# Altium PCB QuadCurrentLoopCape.PcbDoc
Units mil, origin at the board's own origin, x right, y up, seen from the top; angles counter-clockwise.
Board outline 3400 x 2150 mil, 4 copper layers (Component Side, Ground Plane, +3V3, Solder Side), stack 32.517 mil thick; 75 components, 68 nets, 363 pads, 39 vias.
Unrouted connection lines stored in the file: 1.
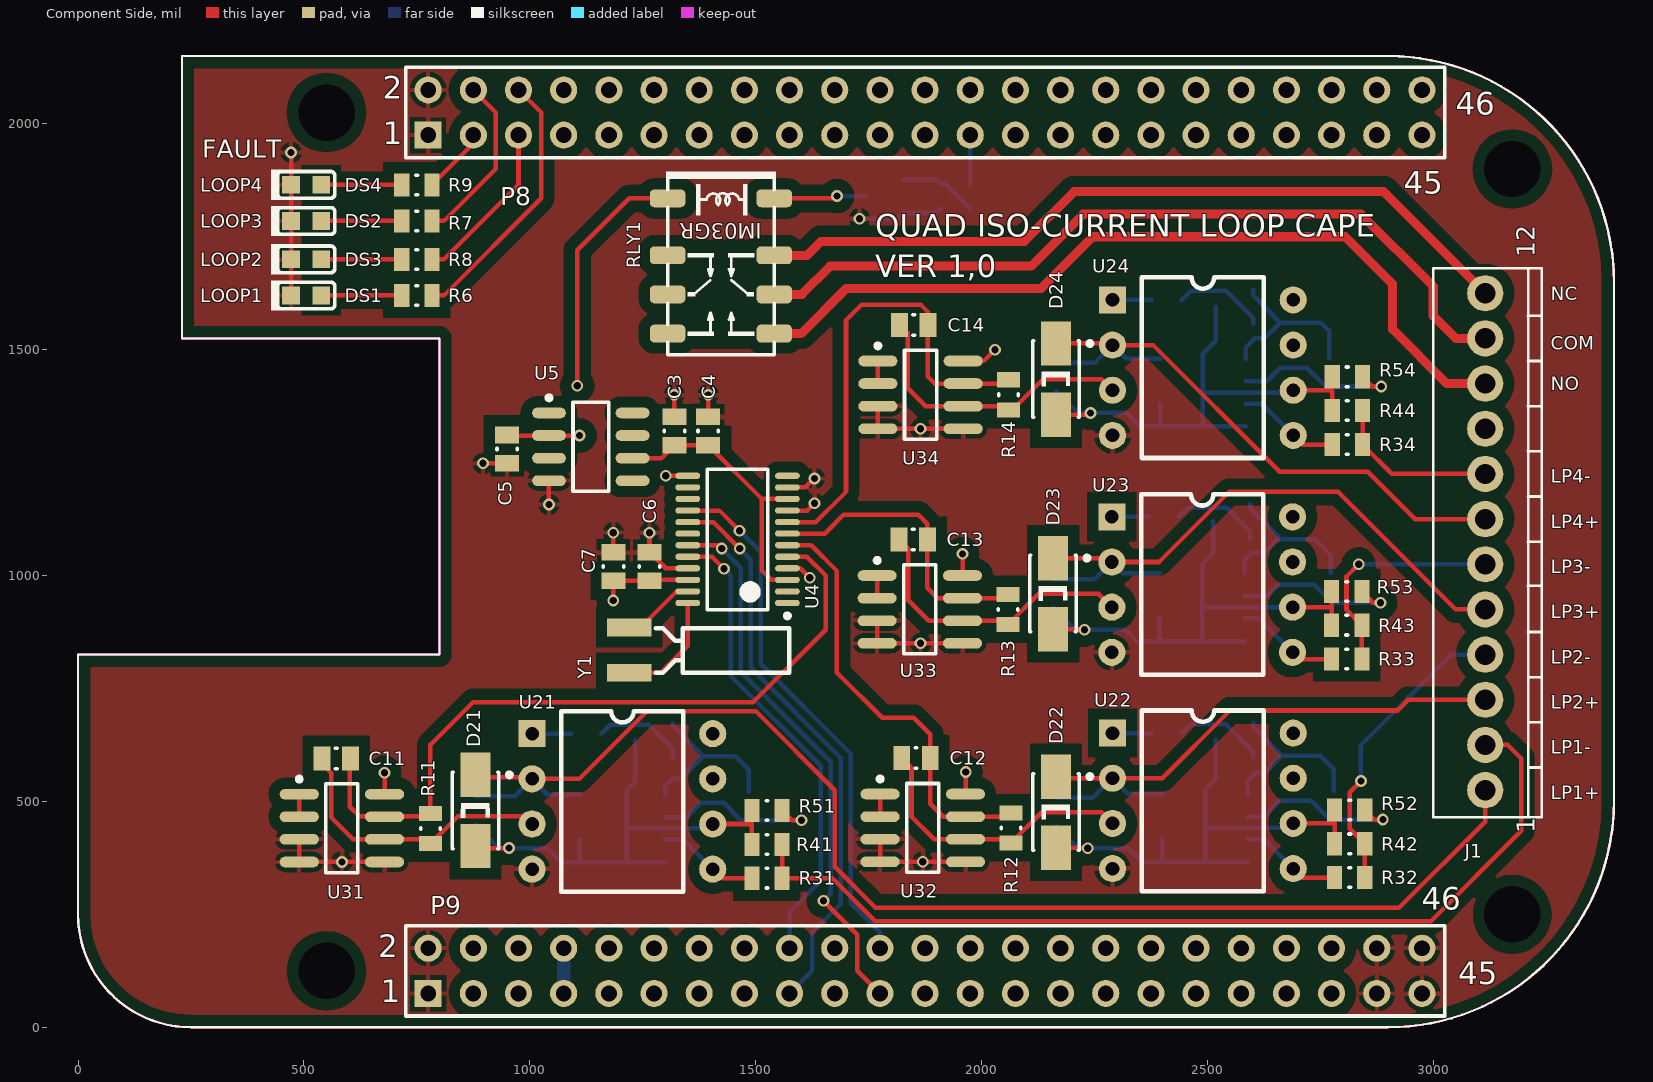
[diagram p0: Component Side view]
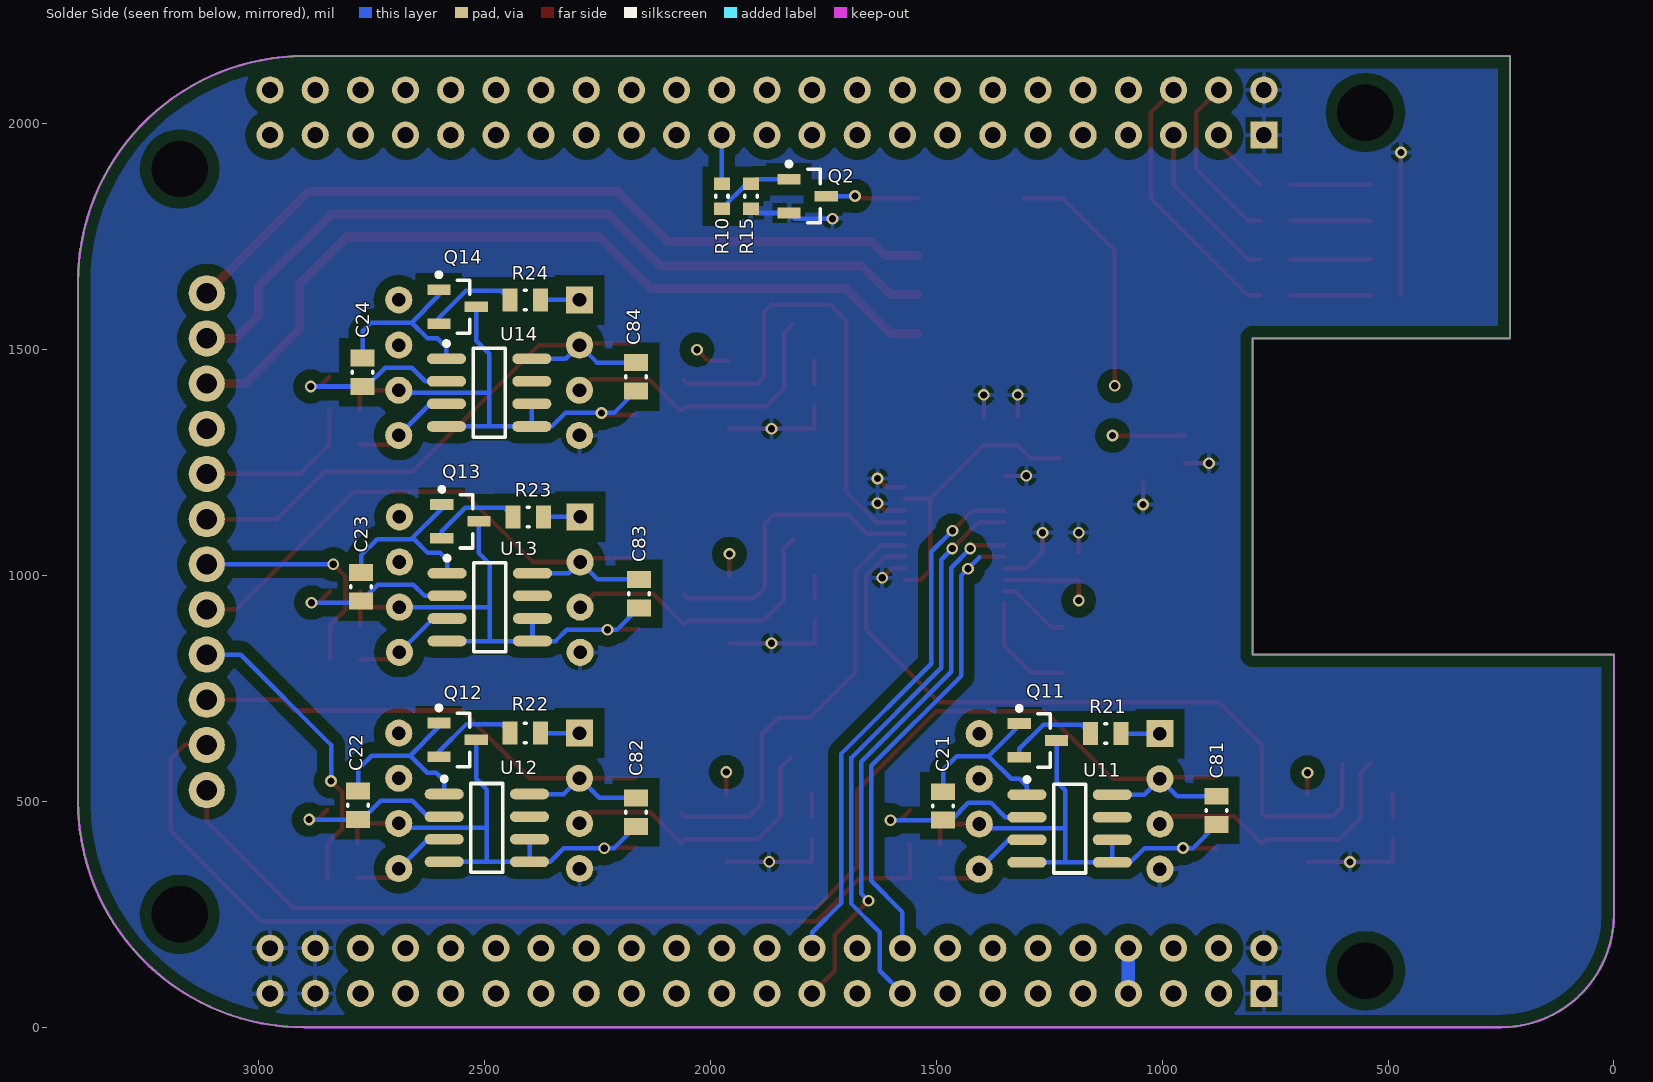
[diagram p1: Solder Side view, seen from below]
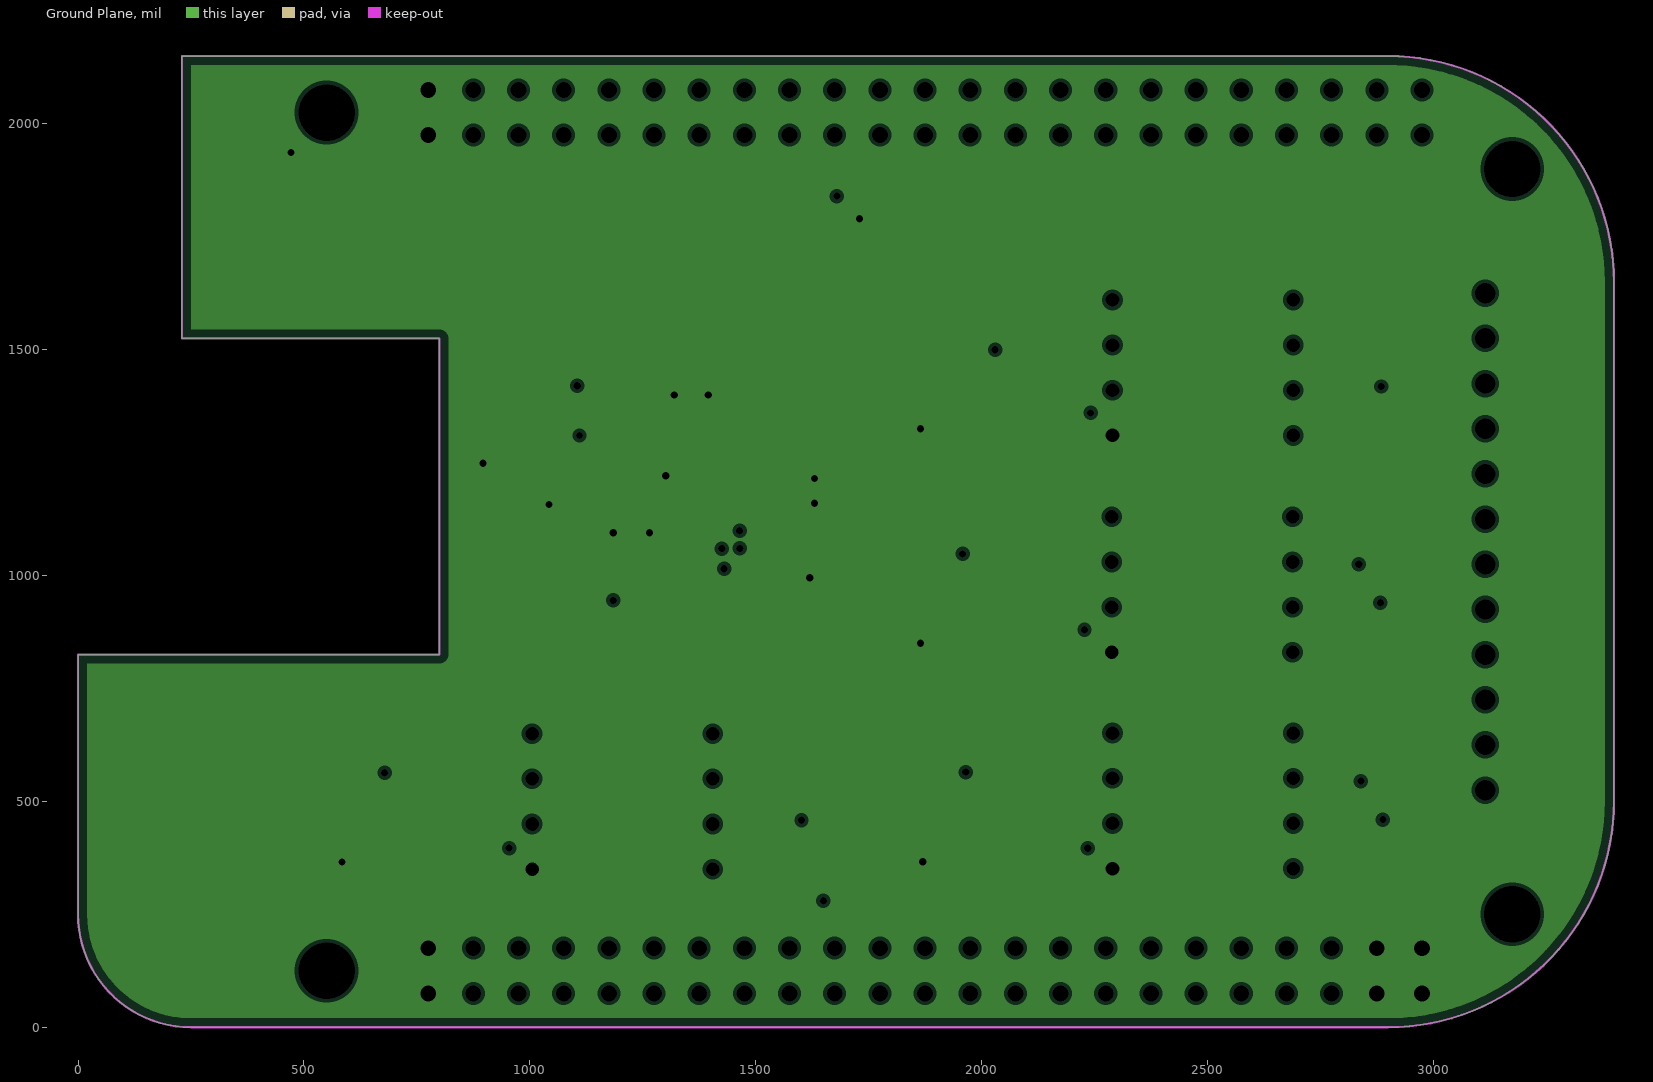
[diagram p2: Ground Plane, clearances drawn from the general rule]
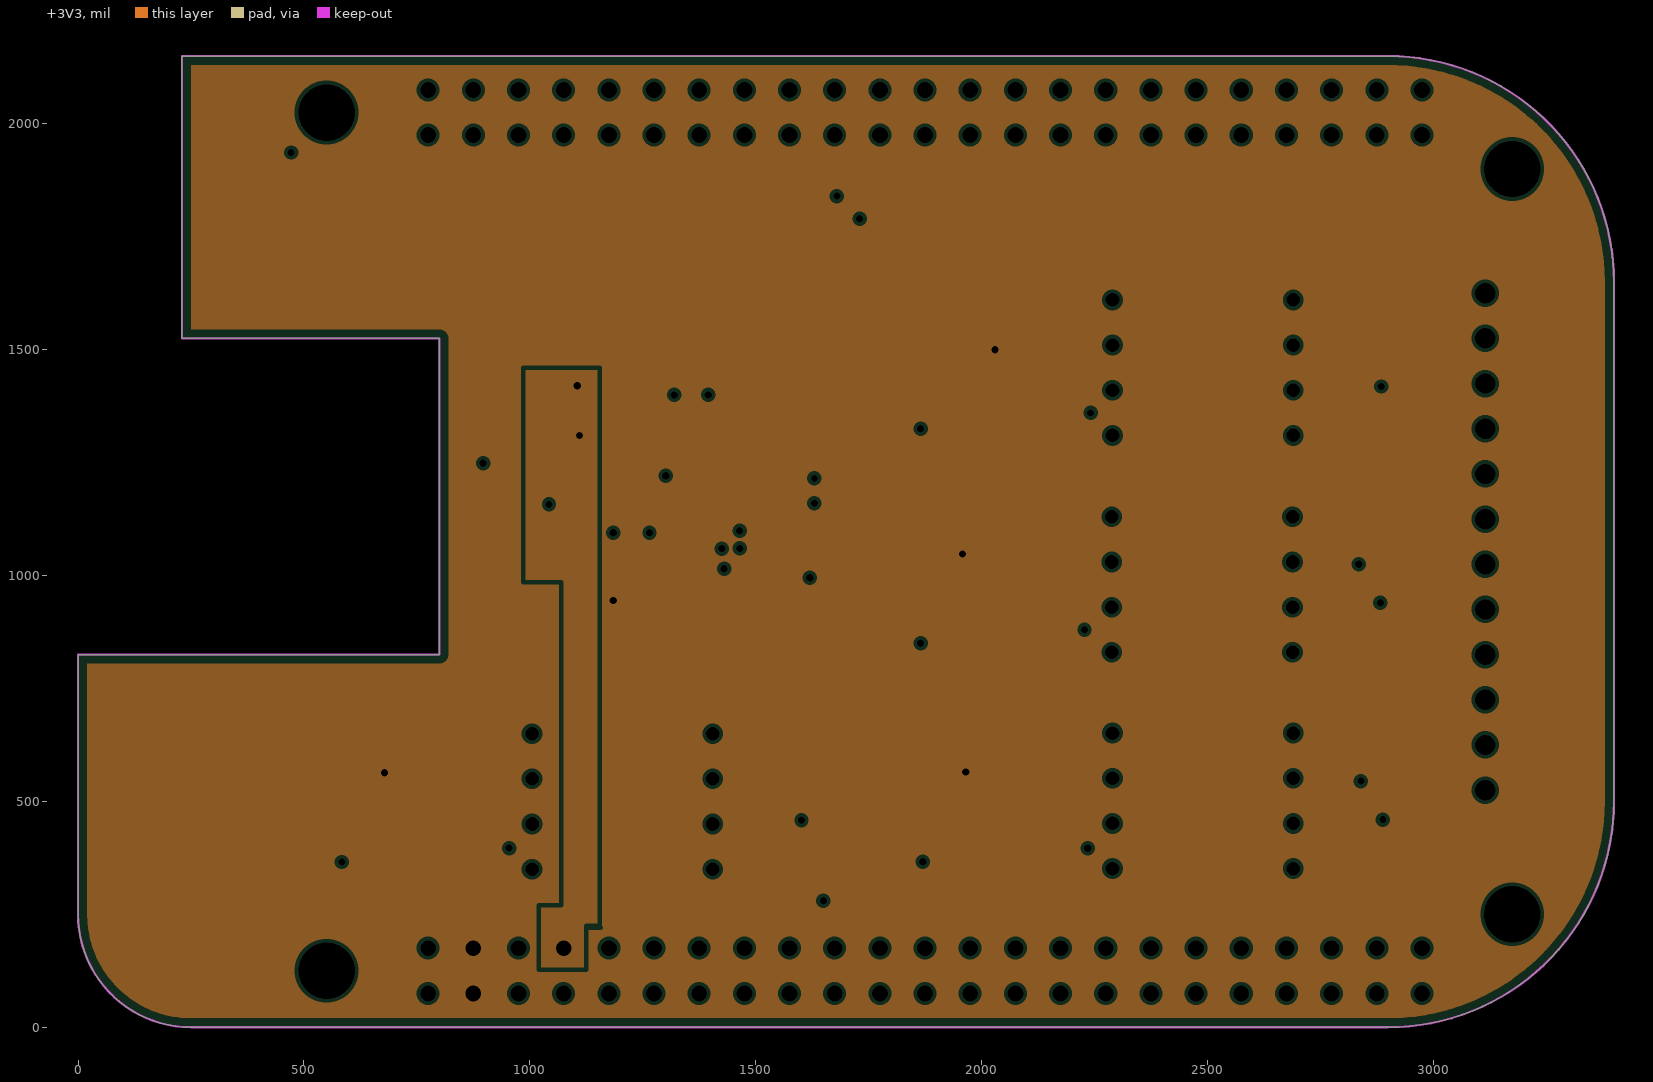
[diagram p3: +3V3, clearances drawn from the general rule]

## Layer stack, top to bottom
Top Solder: solder mask 0.4, Solder Resist, Dk 3.5
Component Side: signal copper 1.4
Dielectric 1: core 12.6, FR-4, Dk 4.8
Ground Plane: plane copper 0.7, net GND
Dielectric 3: prepreg 5, Dk 4.2
+3V3: plane copper 1.417, net (Multiple Nets)
Dielectric 4: core 10, Dk 4.2
Solder Side: signal copper 1.4
Bottom Solder: solder mask 0.4, Solder Resist, Dk 3.5

## Board outline
0,250 0,825 800,825 800,1525 230,1525 230,2150 2900,2150 cw(c2900,1650) 3400,1650 3400,500 cw(c2900,500) 2900,0 250,0 cw(c250,250)

## Design rules (kind name [scope] priority, off if disabled: settings)
Clearance Clearance_2 [InNamedPolygon('BOTTOM GND')] p1: gap=25
Clearance Clearance_1 [InNamedPolygon('TOP GND')] p2: gap=25
Clearance [All] p3: gap=8
ComponentClearance [All] p1 off: gap=5 collisioncheckmode=3 verticalgap=10 showdistances=FALSE
PlaneClearance [All] p1: clearance=8
PlaneConnect [All] p1: planeconnectstyle=Direct reliefexpansion=20 reliefentries=4 reliefconductorwidth=10 reliefairgap=10
PolygonConnect [All] p1: connectstyle=Relief reliefconductorwidth=10 reliefentries=4 polygonreliefangle="90 Angle" airgapwidth=10
RoutingVias [All] p1: holewidth=10 width=20 viastyle="Through Hole" minholewidth=6 minwidth=16 maxholewidth=16 maxwidth=26
SolderMaskExpansion "Via Expansion" [IsVia] p1: expansion=-100
SolderMaskExpansion SolderMaskExpansion_1 [All] p2: expansion=0
Width [All] p1: maxlimit=30 minlimit=8 preferedwidth=10
26 further rules are at their usual default settings.

## Classes and differential pairs
component class QuadCurrentLoopCape: C3 C4 C5 C6 C7 DS1 DS2 DS3 DS4 J1 P8 P9 Q2 R6 R7 R8 R9 R10 R15 RLY1 U4 U5 Y1
component class U_IsoInput1: C11 C21 C81 D21 Q11 R11 R21 R31 R41 R51 U11 U21 U31
component class U_IsoInput2: C12 C22 C82 D22 Q12 R12 R22 R32 R42 R52 U12 U22 U32
component class U_IsoInput3: C13 C23 C83 D23 Q13 R13 R23 R33 R43 R53 U13 U23 U33
component class U_IsoInput4: C14 C24 C84 D24 Q14 R14 R24 R34 R44 R54 U14 U24 U34
net class L+[4..1]: L+1 L+2 L+3 L+4
net class L-[4..1]: L-1 L-2 L-3 L-4
net class VOUT[4..1]: VOUT1 VOUT2 VOUT3 VOUT4
channel class IsoInput: U_IsoInput1 U_IsoInput2 U_IsoInput3 U_IsoInput4

## Components (designator, comment, footprint, x,y, rotation, side; value= is the part's Value field where it differs from the comment)
C3 "CAP 10uF 16V 0805(2012)" CAPC0805(2012)145_L 1320,1320 r270 top
C4 "CAP 100nF 50V 0805(2012)" CAPC0805(2012)145_L 1395,1320 r270 top
C5 "CAP 100nF 50V 0805(2012)" CAPC0805(2012)145_L 950,1280 r90 top
C6 "CAP 100nF 50V 0805(2012)" CAPC0805(2012)145_L 1265,1020 r270 top
C7 "CAP 10uF 16V 0805(2012)" CAPC0805(2012)145_L 1185,1020 r270 top
C11 "CAP 1nF 50V 0805(2012)" CAPC0805(2012)100_L 571.5,595 r0 top (schematic designator C1)
C12 "CAP 1nF 50V 0805(2012)" CAPC0805(2012)100_L 1855,596.26 r0 top (schematic designator C1)
C13 "CAP 1nF 50V 0805(2012)" CAPC0805(2012)100_L 1848.5,1080 r0 top (schematic designator C1)
C14 "CAP 1nF 50V 0805(2012)" CAPC0805(2012)100_L 1850,1555 r0 top (schematic designator C1)
C21 "CAP 1nF 50V 0805(2012)" CAPC0805(2012)100_L 1485,490 r90 bottom (schematic designator C2)
C22 "CAP 1nF 50V 0805(2012)" CAPC0805(2012)100_L 2780,491.26 r90 bottom (schematic designator C2)
C23 "CAP 1nF 50V 0805(2012)" CAPC0805(2012)100_L 2773.5,975 r90 bottom (schematic designator C2)
C24 "CAP 1nF 50V 0805(2012)" CAPC0805(2012)100_L 2770,1450 r90 bottom (schematic designator C2)
C81 "CAP 100nF 50V 0805(2012)" CAPC0805(2012)100_L 880,480 r90 bottom (schematic designator C8)
C82 "CAP 100nF 50V 0805(2012)" CAPC0805(2012)100_L 2165,476.26 r90 bottom (schematic designator C8)
C83 "CAP 100nF 50V 0805(2012)" CAPC0805(2012)100_L 2158.5,960 r90 bottom (schematic designator C8)
C84 "CAP 100nF 50V 0805(2012)" CAPC0805(2012)100_L 2165,1440 r90 bottom (schematic designator C8)
D21 "5.1V" DIOD-S1M-13-F-SMA-2_V 880,480 r90 top (schematic designator D2)
D22 "5.1V" DIOD-S1M-13-F-SMA-2_V 2165,476.26 r90 top (schematic designator D2)
D23 "5.1V" DIOD-S1M-13-F-SMA-2_V 2158.5,960 r90 top (schematic designator D2)
D24 "5.1V" DIOD-S1M-13-F-SMA-2_V 2165,1435 r90 top (schematic designator D2)
DS1 "LTST-C191KRKT" TOSH-0603LED_RED_V 505,1620 r0 top
DS2 "LTST-C191KRKT" TOSH-0603LED_RED_V 505,1785 r0 top
DS3 "LTST-C191KRKT" TOSH-0603LED_RED_V 505,1700 r0 top
DS4 "LTST-C191KRKT" TOSH-0603LED_RED_V 505,1865 r0 top
J1 "1725753" MPT0.5/12-2.54 3115,525 r180 top locked
P8 "Header 23X2" HDR2X23 775,1975 r0 top locked
P9 "Header 23X2" HDR2X23 775,75 r0 top locked
Q2 "MMBT3904" SOT23_N 1785,1840 r180 bottom
Q11 "MMBT3906" SOT23_N 1275,635 r180 bottom (schematic designator Q1)
Q12 "MMBT3906" SOT23_N 2560,636.26 r180 bottom (schematic designator Q1)
Q13 "MMBT3906" SOT23_N 2553.5,1120 r180 bottom (schematic designator Q1)
Q14 "MMBT3906" SOT23_N 2560,1595 r180 bottom (schematic designator Q1)
R6 "330R 1% 0805(2012)" RESC0805(2012)_L 750,1620 r0 top
R7 "330R 1% 0805(2012)" RESC0805(2012)_L 750,1785 r0 top
R8 "330R 1% 0805(2012)" RESC0805(2012)_L 750,1700 r0 top
R9 "330R 1% 0805(2012)" RESC0805(2012)_L 750,1865 r0 top
R10 "10K0" RESC0603(1608)_L 1975,1840 r90 bottom
R11 "10K 1% 0805(2012)" RESC0805(2012)_L 780,440 r270 top (schematic designator R1)
R12 "10K 1% 0805(2012)" RESC0805(2012)_L 2065,441.26 r270 top (schematic designator R1)
R13 "10K 1% 0805(2012)" RESC0805(2012)_L 2058.5,925 r270 top (schematic designator R1)
R14 "10K 1% 0805(2012)" RESC0805(2012)_L 2060,1400 r270 top (schematic designator R1)
R15 "100K" RESC0603(1608)_L 1910,1840 r270 bottom
R21 "10K 1% 0805(2012)" RESC0805(2012)_L 1125,650 r180 bottom (schematic designator R2)
R22 "10K 1% 0805(2012)" RESC0805(2012)_L 2410,651.26 r180 bottom (schematic designator R2)
R23 "10K 1% 0805(2012)" RESC0805(2012)_L 2403.5,1130 r180 bottom (schematic designator R2)
R24 "10K 1% 0805(2012)" RESC0805(2012)_L 2410,1610 r180 bottom (schematic designator R2)
R31 "10K 1% 0805(2012)" RESC0805(2012)_L 1525,330 r0 top (schematic designator R3)
R32 "10K 1% 0805(2012)" RESC0805(2012)_L 2815,331.26 r0 top (schematic designator R3)
R33 "10K 1% 0805(2012)" RESC0805(2012)_L 2808.5,815 r0 top (schematic designator R3)
R34 "10K 1% 0805(2012)" RESC0805(2012)_L 2810,1290 r0 top (schematic designator R3)
R41 "24R9 1% 0805(2012)" RESC0805(2012)_L 1525,405 r180 top (schematic designator R4)
R42 "24R9 1% 0805(2012)" RESC0805(2012)_L 2815,406.26 r180 top (schematic designator R4)
R43 "24R9 1% 0805(2012)" RESC0805(2012)_L 2808.5,890 r180 top (schematic designator R4)
R44 "24R9 1% 0805(2012)" RESC0805(2012)_L 2810,1365 r180 top (schematic designator R4)
R51 "10K 1% 0805(2012)" RESC0805(2012)_L 1525,480 r180 top (schematic designator R5)
R52 "10K 1% 0805(2012)" RESC0805(2012)_L 2815,481.26 r180 top (schematic designator R5)
R53 "10K 1% 0805(2012)" RESC0805(2012)_L 2808.5,965 r180 top (schematic designator R5)
R54 "10K 1% 0805(2012)" RESC0805(2012)_L 2810,1440 r180 top (schematic designator R5)
RLY1 "IM03GR" TECO-IM-8G-WING 1305,1835 r180 top
U4 "AD7709BRUZ" RU-24_L 1460,1080 r180 top
U5 "AD780AR" R-8C_L 1135,1285 r0 top
U11 "LM158DT" SO8_N 1205,440 r180 bottom (schematic designator U1)
U12 "LM158DT" SO8_N 2495,441.26 r180 bottom (schematic designator U1)
U13 "LM158DT" SO8_N 2488.5,930 r180 bottom (schematic designator U1)
U14 "LM158DT" SO8_N 2490,1405 r180 bottom (schematic designator U1)
U21 "HCNR201" DIP-8W 1005,650 r0 top (schematic designator U4)
U22 "HCNR201" DIP-8W 2290,651.26 r0 top (schematic designator U4)
U23 "HCNR201" DIP-8W 2288.5,1130 r0 top (schematic designator U4)
U24 "HCNR201" DIP-8W 2290,1610.24 r0 top (schematic designator U4)
U31 "LM158DT" SO8_N 584.09,440.91 r0 top (schematic designator U3)
U32 "LM158DT" SO8_N 1870,441.26 r0 top (schematic designator U3)
U33 "LM158DT" SO8_N 1863.5,925 r0 top (schematic designator U3)
U34 "LM158DT" SO8_N 1865,1400 r0 top (schematic designator U3)
Y1 "32KHz" CMR200T 1220,785 r90 top

## Footprints (in the part's own frame and the unit in brackets; to place one, negate y for a bottom-side part, rotate by r counter-clockwise, add the part's x,y. Pads: shape width x height; smd on the part's side, far side on the other; paste and mask are expansions set on the pad)
CAPC0805(2012)100_L [mm] "Chip Capacitor, Body 2.0x1.2mm, Height 1.0mm, IPC High Density"
  rect 0.95x1.35 smd: 1(-0.8,0) 2(0.8,0)
  silkscreen extent -0.05,-0.58 0.05,0.58, body extent -1.1,-0.72 1.1,0.72, height 1
CAPC0805(2012)145_L [mm] "Chip Capacitor, Body 2.0x1.2mm, Height 1.45mm, IPC High Density"
  rect 0.95x1.35 smd: 1(-0.8,0) 2(0.8,0)
  silkscreen extent -0.05,-0.58 0.05,0.58, body extent -1.1,-0.72 1.1,0.72, height 1.45
CMR200T [mm] "Citizen Watch Crystal"
  rect 1x2.5 smd: 1(0,0) 2(2.54,0)
  silkscreen extent 0,-9 2.5,-1.5, body extent 0.4,-9.1 2.09,-3.1, height 1.7
DIOD-S1M-13-F-SMA-2_V [mm] "SMD, 2-Leads, Body 4.3x2.605mm, Height 2.3mm"
  rect 2.5x1.7 smd: 1(-2,0) 2(2,0)
  silkscreen extent -2.15,-2.03 2.15,1.3, body extent -2.15,-1.3 2.15,1.3, height 2.3
DIP-8W [mil]
  rect 60x60 hole 30: 1(0,0)
  round 60 hole 30: 2(0,-100) 3(0,-200) 4(0,-300) 5(400,-300) 6(400,-200) 7(400,-100) 8(400,0)
  silkscreen extent 65,-350 335,50, body extent 60,-355 340,55, height 150
HDR2X23 [mil]
  rect 60x60 hole 35: 1(0,0)
  round 60 hole 35: 2(0,100) 3(100,0) 4(100,100) 5(200,0) 6(200,100) 7(300,0) 8(300,100) 9(400,0) 10(400,100) 11(500,0) 12(500,100) 13(600,0) 14(600,100) 15(700,0) 16(700,100) 17(800,0) 18(800,100) 19(900,0) 20(900,100) 21(1000,0) 22(1000,100) 23(1100,0) 24(1100,100) 25(1200,0) 26(1200,100) 27(1300,0) 28(1300,100) 29(1400,0) 30(1400,100) 31(1500,0) 32(1500,100) 33(1600,0) 34(1600,100) 35(1700,0) 36(1700,100) 37(1800,0) 38(1800,100) 39(1900,0) 40(1900,100) 41(2000,0) 42(2000,100) 43(2100,0) 44(2100,100) 45(2200,0) 46(2200,100)
  silkscreen extent -50,-50 2250,150
MPT0.5/12-2.54 [mil] "PCB Terminal Block"
  round 80 hole 45: 1(0,0) 2(0,-100) 3(0,-200) 4(0,-300) 5(0,-400) 6(0,-500) 7(0,-600) 8(0,-700) 9(0,-800) 10(0,-900) 11(0,-1000) 12(0,-1100)
  silkscreen extent -125,-1155 115,60, body extent -124,-1158 120,60, height 335
R-8C_L [mm] "SOIC, 8-Leads, Body 4.9x3.9mm, Pitch 1.27mm, IPC High Density"
  oval 1.9x0.6 smd: 1(-2.35,1.905) 2(-2.35,0.635) 3(-2.35,-0.635) 4(-2.35,-1.905) 5(2.35,-1.905) 6(2.35,-0.635) 7(2.35,0.635) 8(2.35,1.905)
  silkscreen extent -2.47,-2.5 1,2.88, body extent -2,-2.5 2,2.5, height 1.75
RESC0603(1608)_L [mm] "Chip Resistor, Body 1.6x0.8mm, IPC High Density"
  rect 0.7x0.9 smd: 1(-0.7,0) 2(0.7,0)
  silkscreen extent -0.05,-0.35 0.05,0.35, body extent -0.85,-0.47 0.85,0.47, height 0.6
RESC0805(2012)_L [mm] "Chip Resistor, Body 2.0x1.3mm, IPC High Density"
  rect 0.85x1.3 smd: 1(-0.85,0) 2(0.85,0)
  silkscreen extent -0.05,-0.55 0.05,0.55, body extent -1.1,-0.67 1.1,0.68, height 0.7
RU-24_L [mm] "TSOP, 24-Leads, Body 7.8x4.4mm, Pitch 0.65mm, IPC High Density"
  oval 1.4x0.35 smd: 1(-2.8,3.575) 2(-2.8,2.925) 3(-2.8,2.275) 4(-2.8,1.625) 5(-2.8,0.975) 6(-2.8,0.325) 7(-2.8,-0.325) 8(-2.8,-0.975) 9(-2.8,-1.625) 10(-2.8,-2.275) 11(-2.8,-2.925) 12(-2.8,-3.575) 13(2.8,-3.575) 14(2.8,-2.925) 15(2.8,-2.275) 16(2.8,-1.625) 17(2.8,-0.975) 18(2.8,-0.325) 19(2.8,0.325) 20(2.8,0.975) 21(2.8,1.625) 22(2.8,2.275) 23(2.8,2.925) 24(2.8,3.575)
  silkscreen extent -2.93,-3.95 1.7,4.42, body extent -2.25,-3.95 2.25,3.95, height 1.2
SO8_N [mm] "SOIC, 8-Leads, Body 4.9x3.9mm, Pitch 1.27mm, IPC Medium Density"
  oval 2.2x0.6 smd: 1(-2.4,1.905) 2(-2.4,0.635) 3(-2.4,-0.635) 4(-2.4,-1.905) 5(2.4,-1.905) 6(2.4,-0.635) 7(2.4,0.635) 8(2.4,1.905)
  silkscreen extent -2.53,-2.5 0.9,2.88, body extent -1.95,-2.45 1.95,2.45, height 1.75
SOT23_N [mm] "SOT23, 3-Leads, Body 2.9x1.3mm, Pitch 0.95mm, Lead Span 2.3mm, IPC Medium Density"
  rect 1.3x0.6 smd: 1(-1.05,0.95) 2(-1.05,-0.95) 3(1.05,0)
  silkscreen extent -1.18,-1.5 0.7,1.92, body extent -0.7,-1.5 0.7,1.5, height 1.1
TECO-IM-8G-WING [mm] "Relay, 8-Leads, Body 10x6mm, Height 5.65mm, Pitch 2.2mm"
  rrect50% 2x1 smd paste+0 mask+0: 1(0,0) 2(0,3.2) 3(0,5.4) 4(0,7.6) 5(-6,7.6) 6(-6,5.4) 7(-6,3.2) 8(-6,0)
  silkscreen extent -6.1,-1.5 0.1,8.8, body extent -6.79,-1.02 0.7,8.64, height 3.8
TOSH-0603LED_RED_V [mm] "SMT LED, 2-Leads, Body 1.6x0.8mm (0603-Size)"
  rect 1x1 smd paste+0 mask+0: 1(0.85,0) 2(-0.85,0)
  silkscreen extent -1.97,-0.85 1.6,0.85, body extent -0.92,-0.53 1.09,0.53, height 0.6

## Part data
C3 C7: library part CMP-1036-04929-1, "CAP 10uF 16V ±20% 0805 (2012 Metric) Thickness 1.45mm SMD"
C4 C5 C6: library part CMP-1036-04422-1, "CAP 100nF 50V ±20% 0805 (2012 Metric) Thickness 1.45mm SMD"
C11 C12 C13 C14 C21 C22 C23 C24: library part CMP-1036-02980-1, "CAP 1nF 50V ±10% 0805 (2012 Metric) Thickness 1mm SMD"
C81 C82 C83 C84: library part CMP-1036-04420-1, "CAP 100nF 50V ±10% 0805 (2012 Metric) Thickness 1mm SMD"
D21 D22 D23 D24: library part CMP-0639-00001-1, "Surface Mount Glass Passivated Rectifier, 1000V, 1 A, -65 to 5.1V Zener Diode SMA"
DS1 DS2 DS3 DS4: library part CMP-0444-00001-1, "LED, Red 0603 (1608) 63mCd"
J1: library part Pheonix12
P8 P9: "Header, 23-Pin, Dual Row"
Q2: "NPN Switching Transistor"
Q11 Q12 Q13 Q14: "PNP Switching Transistor"
R6 R7 R8 R9: library part CMP-1013-00454-1, "330R 0.125W 1% 0805 (2012 Metric)  SMD"
R10: library part CMP-1012-00623-1, "10K 0.1W 1% 0603 (1608 Metric)  SMD"
R11 R12 R13 R14 R21 R22 R23 R24 R31 R32 R33 R34 R51 R52 R53 R54: library part CMP-1013-00623-1, "10K 0.125W 1% 0805 (2012 Metric)  SMD"
R15: library part CMP-1012-00736-1, "100K 0.1W 1% 0603 (1608 Metric)  SMD"
R41 R42 R43 R44: library part CMP-1013-00327-1, "24R9 0.125W 1% 0805 (2012 Metric)  SMD"
RLY1: library part CMP-0439-00001-1, "Low Power Consumption, High Dielectric, High Mechanical Shock Resistance, IM Relay"
U4: library part CMP-0313-01986-2, "Quad 16-Bit Sigma-Delta Analog-to-Digital Converter with Serial, SPI Interface, 105SPS, -40 to +85 degC, RU-24, Pb-Free, Tube"
U5: "2.5V/3.0V Ultrahigh Precision Bandgap Voltage Reference"
U11 U12 U13 U14 U31 U32 U33 U34: library part LM158AD, "Low-Power Dual Operational Amplifier"
U21 U22 U23 U24: "Analog Optocoupler"
Y1: library part XTAL, "Crystal Oscillator"

## Free pads (board coordinates)
  round 100 hole 125 unplated: 0(550,125) 1(550,2025) 2(3175,250) 3(3175,1900)

## Via types
v1: diameter 26, hole 16, Component Side to Solder Side, 39 vias

## Nets (pads, with @x,y where several pads share a name; then routed paths per layer and width w, separated by ;. In a path a pad name is that pad's centre, name@x,y a point inside that pad or via, vN(x,y) a via of type N, cw(c..) or ccw(c..) an arc to the next point about the centre after c; other vN are vias at no path point)
+3V3: C6.2 C7.2 P9.3 P9.4 U4.22 U31.8 U32.8 U33.8 U34.8 | length 434.6
  Component Side w10: U31.8 v1(678.58,563.58) ; v1(1185,945) C7.2 C6.2 1266.93,990.43 U4.22 ; U33.8 v1(1957.99,1047.99) ; U34.8 2005,1475 v1(2030,1500) ; U32.8 1965,516.77 v1(1965,565)
+5: C5.2 P9.7 P9.8 RLY1.1 U5.2 | length 808.3
  Component Side w10: C5.2 951.5,1310 U5.2 v1(1110,1310) ; v1(1105,1420) 1105,1720 1220,1835 RLY1.1
  Solder Side w30: P9.7 P9.8
CLK: P9.22 U4.16 | length 1186.2
  Component Side w10: U4.16 1419.82,1143.98 v1(1464.4,1099.4)
  Solder Side w10: v1(1464.4,1099.4) 1511,1052.79 1511,805 1710,606 1710,275 1775,210 P9.22
CS0: P9.17 U4.17 | length 1263.1
  Component Side w10: U4.17 1405.81,1118.39 v1@1464.6,1059.6
  Solder Side w10: v1@1464.6,1059.6 1489,1035.2 1489,795.89 1688,596.89 1688,273 1625,210 1625,125 P9.17
  other v1: 1465,1060
GND: C3.1 C4.1 C5.1 C6.1 C7.1 DS1.2 DS2.2 DS3.2 DS4.2 P8.1 P8.2 P9.1 P9.2 P9.43 P9.44 P9.45 P9.46 Q2.2 R15.2 U4.4 U4.9 U4.11 U4.13 U4.21 U5.4 U21.4 U22.4 U23.4 U24.4 U31.3 U31.4 U31.5 U32.3 U32.4 U32.5 U33.3 U33.4 U33.5 U34.3 U34.4 U34.5 | length 2093.1
  Component Side w10: DS1.2 DS3.2 DS2.2 DS4.2 v1(471.53,1936.53) ; U31.3 U31.4 v1(584.09,365.91) U31.5 ; v1(896.5,1248.5) C5.1 ; v1(1042.48,1157.52) U5.4 ; C7.1 v1(1185,1095) ; v1(1265,1095) C6.1 1265.67,1051.5 1301.14,1016.02 U4.21 ; v1(1300.75,1220.75) U4.13 ; C3.1 v1(1320,1400) ; C4.1 v1(1395,1400) ; U4.4 1598.98,1016.02 v1(1620,995) ; U4.9 1613.98,1143.98 v1(1630,1160) ; U4.11 1610.16,1195.16 v1(1630,1215) ; U33.3 U33.4 v1(1865,850) U33.5 ; U34.3 U34.4 v1(1865,1325) U34.5 ; U32.3 U32.4 v1(1870,366.26) U32.5
  Solder Side w10: v1(1730,1790) 1813.74,1790 Q2.2 1900.16,1802.6 R15.2
GPIO34: P8.5 R8.2 | length 369.9
  Component Side w10: R8.2 810,1700 975,1865 P8.5
GPIO35: P8.6 R6.2 | length 591.3
  Component Side w10: R6.2 810,1620 1025,1835 1025,2025 P8.6
GPIO38: P8.3 R9.2 | length 147.9
  Component Side w10: R9.2 875,1956.54 P8.3
GPIO39: P8.4 R7.2 | length 384.9
  Component Side w10: R7.2 810,1785 925,1900 925,2025 P8.4
L+1: C81.2 D21.2 J1.1 U11.8 U21.2 | length 2988.1
  Component Side w10: D21.2@880,553.74 1001.26,553.74 U21.2 1110,550 1260,700 1500,700 1675,525 1675,355 1765,265 2925,265 3115,455 J1.1
  Solder Side w10: C81.2 966.5,511.5 U21.2 1040,515 U11.8
L+2: C82.2 D22.2 J1.3 U12.8 U22.2 | length 1291.5
  Component Side w10: D22.2 2168.74,551.26 U22.2 2400,551.26 2550,701.26 2921.26,701.26 2945,725 J1.3
  Solder Side w10: C82.2 2246.5,507.76 U22.2 2325,516.26 U12.8
L+3: C83.2 D23.2 J1.5 U13.8 U23.2 | length 1393.8
  Component Side w10: D23.2 2279.76,1038.74 U23.2 2392.99,1030 2547.99,1185 2790,1185 3050,925 J1.5
  Solder Side w10: C83.2 2250,991.5 U23.2 2313.5,1005 U13.8
L+4: C84.2 D24.2 J1.7 U14.8 U24.2 | length 1370.1
  Component Side w10: D24.2 2286.5,1513.74 U24.2 2379.76,1510.24 2660,1230 2855,1230 2960,1125 J1.7
  Solder Side w10: C84.2 2251.26,1471.5 U24.2 2320.24,1480 U14.8
L-1: J1.2 R31.2 R41.1 | length 2086.2
  Component Side w10: R41.1 R31.2 1670,330 1765,235 2995,235 3195,435 3195,595 3165,625 J1.2
L-2: J1.4 R32.2 R42.1 | length 675.8
  Component Side w10: v1(2840,545) 2815,520 2815,439.72 R42.1 R32.2
  Solder Side w10: v1(2840,545) 2840,625 3040,825 J1.4
L-3: J1.6 R33.2 R43.1 | length 515.3
  Component Side w10: v1(2835,1025) 2807.99,997.99 2807.99,923.98 R43.1 R33.2
  Solder Side w10: v1(2835,1025) J1.6
L-4: J1.8 R34.2 R44.1 | length 373.5
  Component Side w10: R44.1 R34.2 2908.46,1225 J1.8
MISO: P9.21 U4.19 | length 1221.2
  Component Side w10: U4.19 1417.39,1067.2 v1(1424.8,1059.8) ; v1(1650,280) 1725,205 1725,125 P9.21
  Solder Side w10: v1(1424.8,1059.8) 1467,1017.6 1467,786.77 1666,587.77 1666,296 v1(1650,280)
MOSI: P9.18 U4.20 | length 1083.8
  Component Side w10: U4.20 1403.39,1041.61 v1(1430,1015)
  Solder Side w10: 1405,1040 v1(1430,1015) 1445,1000 1445,777.66 1644,578.66 1644,324 1575,255 P9.18
NetC3_2: C3.2 C4.2 U4.3 U4.10 U5.6 | length 627.1
  Component Side w10: U5.6 1291.5,1260 C3.2 C4.2 1513.94,1169.57 ; U4.3 1534.57,990.43 1513.94,1011.06 1513.94,1169.57 ; U4.10 1513.94,1169.57
NetC11_1: C11.1 R11.2 U21.3 U31.6 | length 630
  Component Side w10: C11.1@538.5,585 560,563.5 560,465 608.31,416.69 769.84,416.69 R11.2 840.16,466.69 988.31,466.69 U21.3
NetC12_1: C12.1 R12.2 U22.3 U32.6 | length 646.8
  Component Side w10: C12.1 1845,574.76 1845,466.26 1895,416.26 U32.6 2056.54,416.26 R12.2 2133.46,476.26 2265,476.26 U22.3
NetC13_1: C13.1 R13.2 U23.3 U33.6 | length 657.1
  Component Side w10: C13.1 1837.99,1059.02 1837.99,945 1882.99,900 U33.6 2050.04,900 R13.2 2126.97,960 2258.5,960 U23.3
NetC14_1: C14.1 R14.2 U24.3 U34.6 | length 659.6
  Component Side w10: C14.1 1836.5,1537.01 1836.5,1415 1876.5,1375 U34.6 2051.54,1375 R14.2 2068.03,1366.54 2136.5,1435 2265.24,1435 U24.3
NetC21_1: C21.1 R51.1 U11.2 | length 382.9
  Component Side w10: R51.1 1579.96,458.5 v1(1601.5,458.5)
  Solder Side w10: U11.2 1347.4,465 1379.09,496.69 1429.09,496.69 1467.28,458.5 C21.1 v1(1601.5,458.5)
NetC21_2: C21.2 Q11.1 U11.1 | length 393.7
  Solder Side w10: U11.1 1299.49,534.49 1315,550 1334.49,550 1384.49,600 ; Q11.1 1316.34,668.15 1384.49,600 ; C21.2 1485,570 1455,600 1384.49,600
NetC22_1: C22.1 R52.1 U12.2 | length 381.8
  Component Side w10: R52.1 2869.96,459.76 v1(2888.5,459.76)
  Solder Side w10: U12.2 2625,466.26 2660,501.26 2730.22,501.26 2771.72,459.76 C22.1 v1(2888.5,459.76) v1@2890,461.26
NetC22_2: C22.2 Q12.1 U12.1 | length 402.7
  Solder Side w10: U12.1 2589.49,545.75 2607.24,563.5 2627.24,563.5 2665,601.26 ; Q12.1 2601.34,664.92 2665,601.26 ; C22.2 2780,571.26 2750,601.26 2665,601.26
NetC23_1: C23.1 R53.1 U13.2 | length 378.3
  Component Side w10: R53.1 2866.97,940 v1(2882.99,940)
  Solder Side w10: U13.2 2632.99,955 2657.99,980 2736.34,980 2772.84,943.5 C23.1 2777.01,940 v1(2882.99,940)
NetC23_2: C23.2 Q13.1 U13.1 | length 397.5
  Solder Side w10: U13.1 2582.99,1035 2597.99,1050 2625.65,1050 2655.65,1080 2662.99,1080 ; Q13.1 2594.84,1148.15 2662.99,1080 ; C23.2 2773.5,1044.49 2737.99,1080 2662.99,1080
NetC24_1: C24.1 R54.1 U14.2 | length 380.6
  Component Side w10: R54.1 2864.96,1418.5 v1(2885,1418.5)
  Solder Side w10: U14.2 2631.5,1430 2661.5,1460 2720.22,1460 2761.72,1418.5 C24.1 v1(2885,1418.5)
NetC24_2: C24.2 Q14.1 U14.1 | length 398
  Solder Side w10: U14.1 2584.49,1504.49 2605,1525 2626.5,1525 2661.5,1560 ; Q14.1 2601.34,1620.16 2661.5,1560 ; C24.2 2770,1541.5 2751.5,1560 2661.5,1560
NetC81_1: C81.1 D21.1 Q11.3 R41.2 R51.2 U11.4 U11.5 U11.6 U21.6 | length 1184.7
  Component Side w10: D21.1@880,396.26 953.66,396.26 v1(954.09,396.69) ; U21.6 1489.84,450 1491.54,451.69 R41.2
  Solder Side w10: C81.1 931.81,396.69 v1(954.09,396.69) 1039.09,396.69 1070.79,365 U11.5 ; U11.6 U11.5 ; Q11.3 1233.66,543.66 1215,525 1215,441.69 ; U11.4 1215,365 ; U21.6 1395.19,440.19 1216.5,440.19 1215,441.69 ; U11.5 1215,365 ; 1215,365 1215,441.69
NetC82_1: C82.1 D22.1 Q12.3 R42.2 R52.2 U12.4 U12.5 U12.6 U22.6 | length 1193
  Component Side w10: D22.1 2233.74,397.52 v1(2235,396.26) ; U22.6 2781.54,451.26 R42.2
  Solder Side w10: C82.1 2213.5,396.26 v1(2235,396.26) 2325,396.26 2355,366.26 U12.5 ; U12.6 U12.5 ; Q12.3 2518.66,549.92 2495,526.26 2495,441.26 ; U12.4 2495,366.26 ; U22.6 2680,441.26 2495,441.26 ; U12.5 2495,366.26 ; 2495,366.26 2495,441.26
NetC83_1: C83.1 D23.1 Q13.3 R43.2 R53.2 U13.4 U13.5 U13.6 U23.6 | length 1212
  Component Side w10: D23.1 2226.73,881.26 v1(2227.99,880) ; U23.6 2775.04,930 ; R43.2 2775.04,930 ; R53.2 2775.04,930
  Solder Side w10: C83.1 2207.01,880 v1(2227.99,880) 2317.99,880 2342.99,855 U13.5 ; U13.6 U13.5 ; Q13.3 2512.99,1119.17 2512.99,1050 2488.5,1025.51 2488.5,930 ; U13.4 2488.5,855 ; U23.6 2488.5,930 ; U13.5 2488.5,855 ; 2488.5,855 2488.5,930
NetC84_1: C84.1 D24.1 Q14.3 R44.2 R54.2 U14.4 U14.5 U14.6 U24.6 | length 1190.7
  Component Side w10: D24.1 2237.76,1356.26 v1(2241.5,1360) ; U24.6 2776.3,1410.24 2776.54,1410 R44.2
  Solder Side w10: C84.1 2213.5,1360 v1(2241.5,1360) 2321.5,1360 2351.5,1330 U14.5 ; U14.6 U14.5 ; Q14.3 2518.66,1519.92 2490,1491.26 2490,1405 ; U14.4 2490,1330 ; U24.6 2684.76,1405 2490,1405 ; U14.5 2490,1330 ; 2490,1330 2490,1405
NetDS1_1: DS1.1 R6.1 | length 178.1
  Component Side w10: DS1.1 R6.1
NetDS2_1: DS2.1 R7.1 | length 178.1
  Component Side w10: DS2.1 R7.1
NetDS3_1: DS3.1 R8.1 | length 178.1
  Component Side w10: DS3.1 R8.1
NetDS4_1: DS4.1 R9.1 | length 178.1
  Component Side w10: DS4.1 R9.1
NetJ1_10: J1.10 RLY1.5 | length 1855.7
  Component Side w20: RLY1.5 1600.79,1535.79 1700,1635 2131.42,1635 2246.42,1750 2805,1750 2910,1645 2910,1545 3030,1425 J1.10
NetJ1_11: J1.11 RLY1.6 | length 13502.8
  Component Side w5: 0,250 ccw(c250,250) 250,0 2900,0 ccw(c2900,500) 3400,500 3400,1650 ccw(c2900,1650) 2900,2150 230,2150 230,1525 800,1525 800,825 0,825 0,250
  Component Side w20: RLY1.6 1602.4,1622.4 1665,1685 2110,1685 2225,1800 2840,1800 3000,1640 3000,1575 3050,1525 J1.11
NetJ1_12: J1.12 RLY1.7 | length 1725.4
  Component Side w20: RLY1.7 1614.02,1709.02 1645,1740 2095,1740 2205,1850 2890,1850 J1.12
NetP8_25: P8.25 R10.2 | length 107.4
  Solder Side w10: R10.2 P8.25
NetQ2_1: Q2.1 R10.1 R15.1 | length 175.6
  Solder Side w10: Q2.1 1900.16,1877.4 R15.1 1919.88,1867.56 R10.1
NetQ2_3: Q2.3 RLY1.8 | length 204.5
  Component Side w10: RLY1.8 1675,1835 v1(1680,1840)
  Solder Side w10: v1(1680,1840) Q2.3
NetQ11_2: Q11.2 R21.1 | length 207.3
  Solder Side w10: R21.1 1178.46,670 1262.95,670 1316.34,616.62 Q11.2
NetQ12_2: Q12.2 R22.1 | length 202.6
  Solder Side w10: R22.1 2463.46,671.26 2540,671.26 2601.34,609.92 Q12.2
NetQ13_2: Q13.2 R23.1 | length 203.2
  Solder Side w10: R23.1 2456.97,1150 2542.99,1150 2594.84,1098.15 Q13.2
NetQ14_2: Q14.2 R24.1 | length 203.5
  Solder Side w10: R24.1 2463.46,1630 2541.5,1630 2601.34,1570.16 Q14.2
NetR21_2: R21.2 U21.1 | length 86.5
  Solder Side w10: U21.1 R21.2
NetR22_2: R22.2 U22.1 | length 86.5
  Solder Side w10: U22.1 R22.2
NetR23_2: R23.2 U23.1 | length 81.5
  Solder Side w10: U23.1 R23.2
NetR24_2: R24.2 U24.1 | length 86.6
  Solder Side w10: U24.1 2376.3,1610.24 R24.2
NetR31_1: R31.1 U11.3 U21.5 | length 227.3
  Component Side w10: U21.5 1425,330 R31.1
  Solder Side w10: U11.3 1340,415 U21.5
NetR32_1: R32.1 U12.3 U22.5 | length 227.3
  Component Side w10: U22.5 2710,331.26 R32.1
  Solder Side w10: U12.3 2625,416.26 U22.5
NetR33_1: R33.1 U13.3 U23.5 | length 229.3
  Component Side w10: U23.5 2703.5,815 R33.1
  Solder Side w10: U13.3 2613.5,905 U23.5
NetR34_1: R34.1 U14.3 U24.5 | length 229.3
  Component Side w10: U24.5 2710.24,1290 R34.1
  Solder Side w10: U14.3 2620.24,1380 U24.5
NetU4_23: U4.23 Y1.2 | length 162.8
  Component Side w10: Y1.2 1245,885 1324.84,964.84 U4.23
NetU4_24: U4.24 Y1.1 | length 249
  Component Side w10: Y1.1 1290,785 1349.76,844.76 U4.24
NetU31_1: U31.1 U31.2 | length 50
  Component Side w10: U31.2 U31.1
NetU32_1: U32.1 U32.2 | length 50
  Component Side w10: U32.2 U32.1
NetU33_1: U33.1 U33.2 | length 50
  Component Side w10: U33.2 U33.1
NetU34_1: U34.1 U34.2 | length 50
  Component Side w10: U34.2 U34.1
VOUT1: C11.2 R11.1 U4.5 U31.7 | length 1641
  Component Side w10: C11.2@601.5,585 601.5,488.5 623.31,466.69 773.23,466.69 R11.1 780,625 875,720 1495,720 1655,880 1655,1000 1613.39,1041.61 U4.5
VOUT2: C12.2 R12.1 U4.6 U32.7 | length 969.1
  Component Side w10: U4.6 1622.8,1067.2 1680,1010 1680,785 1780,685 1850,685 1886.5,648.5 C12.2 1886.5,494.76 1915,466.26 U32.7 2056.54,466.26 R12.1
VOUT3: C13.2 R13.1 U4.7 U33.7 | length 669.1
  Component Side w10: U4.7 1652.8,1092.8 1695,1135 1860,1135 1880,1115 C13.2 1880,972.99 1902.99,950 U33.7 2050.04,950 R13.1
VOUT4: C14.2 R14.1 U4.8 U34.7 | length 1071.9
  Component Side w10: U4.8 1633.39,1118.39 1700,1185 1700,1565 1735,1600 1865,1600 1881.5,1583.5 C14.2 1881.5,1440 1896.5,1425 U34.7 2051.54,1425 R14.1
pads on no net: J1.9 P8.7 P8.8 P8.9 P8.10 P8.11 P8.12 P8.13 P8.14 P8.15 P8.16 P8.17 P8.18 P8.19 P8.20 P8.21 P8.22 P8.23 P8.24 P8.26 P8.27 P8.28 P8.29 P8.30 P8.31 P8.32 P8.33 P8.34 P8.35 P8.36 P8.37 P8.38 P8.39 P8.40 P8.41 P8.42 P8.43 P8.44 P8.45 P8.46 P9.5 P9.6 P9.9 P9.10 P9.11 P9.12 P9.13 P9.14 P9.15 P9.16 P9.19 P9.20 P9.23 P9.24 P9.25 P9.26 P9.27 P9.28 P9.29 P9.30 P9.31 P9.32 P9.33 P9.34 P9.35 P9.36 P9.37 P9.38 P9.39 P9.40 P9.41 P9.42 RLY1.2 RLY1.3 RLY1.4 U4.1 U4.2 U4.12 U4.14 U4.15 U4.18 U5.1 U5.3 U5.5 U5.7 U5.8 U11.7 U12.7 U13.7 U14.7 U21.7 U21.8 U22.7 U22.8 U23.7 U23.8 U24.7 U24.8
copper on no net: | length 11703.5
  Solder Side w5: 0,250 ccw(c250,250) 250,0 2900,0 ccw(c2900,500) 3400,500 3400,1650 ccw(c2900,1650) 2900,2150 230,2150 230,1525 800,1525 800,825 0,825 0,250

## Polygon pours and split planes (outlines as drawn)
GND on Solder Side "BOTTOM GND" (solid, remove dead copper, pour order 4): -30,2205 -35,2200 -35,-75 3120,-75 3515,320 3525,330 3525,1985 3260,2250 2885,2250 10,2250 -35,2205
GND on Component Side "TOP GND" (solid, remove dead copper, pour order 2): -35,2190 -60,2165 -60,-170 3320,-170 3515,25 3415,125 3415,2205 -20,2205 -35,2190
GND on Ground Plane (split plane): 2918.84,2129.62 2937.66,2128.51 2956.42,2126.67 2975.09,2124.08 2993.64,2120.77 3012.05,2116.73 3030.29,2111.97 3048.33,2106.5 3066.13,2100.32 3083.69,2093.46 3100.95,2085.9 3117.91,2077.68 3134.53,2068.79 3150.8,2059.26 3166.67,2049.1 3182.13,2038.32 3197.16,2026.95 3211.73,2014.99 3225.82,2002.47 3239.41,1989.41 3252.47,1975.82 3264.99,1961.73 3276.95,1947.16 3288.32,1932.13 3299.1,1916.67 3309.26,1900.8 3318.79,1884.53 3327.68,1867.91 3335.9,1850.95 3343.46,1833.69 3350.32,1816.13 3356.5,1798.33 3361.97,1780.29 3366.73,1762.05 3370.77,1743.64 3374.08,1725.09 3376.67,1706.42 3378.51,1687.66 3379.62,1668.84 3379.98,1650.76 3379.9,1650 3379.9,500 3379.98,499.24 3379.62,481.16 3378.51,462.34 3376.67,443.58 3374.08,424.91 3370.77,406.36 3366.73,387.95 3361.97,369.71 3356.5,351.67 3350.32,333.87 3343.46,316.31 3335.9,299.05 3327.68,282.09 3318.79,265.47 3309.26,249.2 3299.1,233.33 3288.32,217.87 3276.95,202.84 3264.99,188.27 3252.47,174.18 3239.41,160.59 3225.82,147.53 3211.73,135.01 3197.16,123.05 3182.13,111.68 3166.67,100.9 3150.8,90.74 3134.53,81.21 3117.91,72.32 3100.95,64.1 3083.69,56.54 3066.13,49.68 3048.33,43.5 3030.29,38.03 3012.05,33.27 2993.64,29.23 2975.09,25.92 2956.42,23.33 2937.66,21.49 2918.84,20.38 2900.76,20.02 2900,20.1 250,20.1 249.31,20.03 237.1,20.37 224.25,21.46 211.48,23.26 198.82,25.78 186.33,29 174.04,32.92 161.99,37.52 150.21,42.79 138.75,48.71 127.64,55.26 116.91,62.43 106.6,70.19 96.75,78.51 87.37,87.37 78.51,96.75 70.19,106.6 62.43,116.91 55.26,127.64 48.71,138.75 42.79,150.21 37.52,161.99 32.92,174.04 29,186.33 25.78,198.82 23.26,211.48 21.46,224.25 20.37,237.1 20.03,249.31 20.1,250 20.1,804.9 800,804.9 803.92,805.29 807.69,806.43 811.17,808.29 814.21,810.79 816.71,813.83 818.57,817.31 819.71,821.08 820.1,825 820.1,1525 819.71,1528.92 818.57,1532.69 816.71,1536.17 814.21,1539.21 811.17,1541.71 807.69,1543.57 803.92,1544.71 800,1545.1 250.1,1545.1 250.1,2129.9 2900,2129.9 2900.76,2129.98
+5 on +3V3 (split plane): 1149.9,230.1 1125,230.1 1123.05,229.71 1121.4,228.6 1120.29,226.95 1119.9,225 1120.29,223.05 1120.56,222.64 1120.29,222.24 1119.9,220.29 1119.9,132.74 1025.1,132.74 1025.1,264.9 1070,264.9 1071.95,265.29 1073.6,266.4 1074.71,268.05 1075.1,270 1075.1,985 1074.71,986.95 1073.6,988.6 1071.95,989.71 1070,990.1 990.1,990.1 990.1,1454.9 1149.9,1454.9
+3V3 on +3V3 (split plane): 2918.84,2129.62 2937.66,2128.51 2956.42,2126.67 2975.09,2124.08 2993.64,2120.77 3012.05,2116.73 3030.29,2111.97 3048.33,2106.5 3066.13,2100.32 3083.69,2093.46 3100.95,2085.9 3117.91,2077.68 3134.53,2068.79 3150.8,2059.26 3166.67,2049.1 3182.13,2038.32 3197.16,2026.95 3211.73,2014.99 3225.82,2002.47 3239.41,1989.41 3252.47,1975.82 3264.99,1961.73 3276.95,1947.16 3288.32,1932.13 3299.1,1916.67 3309.26,1900.8 3318.79,1884.53 3327.68,1867.91 3335.9,1850.95 3343.46,1833.69 3350.32,1816.13 3356.5,1798.33 3361.97,1780.29 3366.73,1762.05 3370.77,1743.64 3374.08,1725.09 3376.67,1706.42 3378.51,1687.66 3379.62,1668.84 3379.98,1650.76 3379.9,1650 3379.9,500 3379.98,499.24 3379.62,481.16 3378.51,462.34 3376.67,443.58 3374.08,424.91 3370.77,406.36 3366.73,387.95 3361.97,369.71 3356.5,351.67 3350.32,333.87 3343.46,316.31 3335.9,299.05 3327.68,282.09 3318.79,265.47 3309.26,249.2 3299.1,233.33 3288.32,217.87 3276.95,202.84 3264.99,188.27 3252.47,174.18 3239.41,160.59 3225.82,147.53 3211.73,135.01 3197.16,123.05 3182.13,111.68 3166.67,100.9 3150.8,90.74 3134.53,81.21 3117.91,72.32 3100.95,64.1 3083.69,56.54 3066.13,49.68 3048.33,43.5 3030.29,38.03 3012.05,33.27 2993.64,29.23 2975.09,25.92 2956.42,23.33 2937.66,21.49 2918.84,20.38 2900.76,20.02 2900,20.1 250,20.1 249.31,20.03 237.1,20.37 224.25,21.46 211.48,23.26 198.82,25.78 186.33,29 174.04,32.92 161.99,37.52 150.21,42.79 138.75,48.71 127.64,55.26 116.91,62.43 106.6,70.19 96.75,78.51 87.37,87.37 78.51,96.75 70.19,106.6 62.43,116.91 55.26,127.64 48.71,138.75 42.79,150.21 37.52,161.99 32.92,174.04 29,186.33 25.78,198.82 23.26,211.48 21.46,224.25 20.37,237.1 20.03,249.31 20.1,250 20.1,804.9 800,804.9 803.92,805.29 807.69,806.43 811.17,808.29 814.21,810.79 816.71,813.83 818.57,817.31 819.71,821.08 820.1,825 820.1,1525 819.71,1528.92 818.57,1532.69 816.71,1536.17 814.21,1539.21 811.17,1541.71 807.69,1543.57 803.92,1544.71 800,1545.1 250.1,1545.1 250.1,2129.9 2900,2129.9 2900.76,2129.98

## Keep-outs
Keep-Out Layer:
  the board outline again, w5

## Other copper
+3V3 (plane layer: these items are gaps in the copper):
  lines w10: 1125,225 1155,225 1155,1460 985,1460 985,985 1070,985 1070,270 1020,270 1020,127.64 1125,127.64 1125,220.29 1156.95,220.29

## Silkscreen, mask and mechanical layers (free items; w line width, h text height)
Top Overlay:
  the board outline again, w5
  text "FAULT" at 275,1925 h40
  text "LOOP4" at 270,1850 h30
  text "LOOP3" at 270,1770 h30
  text "QUAD ISO-CURRENT LOOP CAPE" at 1765,1750 h50
  text "12" at 3225,1705 h40 r90
  text "LOOP2" at 270,1685 h30
  text "VER 1,0" at 1765,1660 h50
  text "NC" at 3260,1610 h30
  text "LOOP1" at 270,1605 h30
  text "COM" at 3260,1500 h30
  text "NO" at 3260,1410 h30
  text "LP4-" at 3260,1205 h30
  text "LP4+" at 3260,1105 h30
  text "LP3-" at 3260,1005 h30
  text "LP3+" at 3260,905 h30
  text "LP2-" at 3260,805 h30
  text "LP2+" at 3260,705 h30
  text "LP1-" at 3260,605 h30
  text "LP1+" at 3260,505 h30
  text "1" at 3225,430 h40 r90

## Text inside footprints (layer, text, board x,y; h text height)
P8: Top Overlay "45" at 2935,1845 h50; Top Overlay "46" at 3050,2020 h50; Top Overlay "1" at 675,1955 h50; Top Overlay "2" at 675,2055 h50
P9: Top Overlay "45" at 3055,95 h50; Top Overlay "46" at 2975,260 h50; Top Overlay "1" at 670,55 h50; Top Overlay "2" at 665,155 h50